# Altium PCB MAM17.PcbDoc
Units mil, origin at the board's own origin, x right, y up, seen from the top; angles counter-clockwise.
Board outline 3937.08 x 4724.82 mil, 2 copper layers (Top Layer, Bottom Layer); 65 components, 42 nets, 237 pads, 29 vias.
Unrouted connection lines stored in the file: 27.
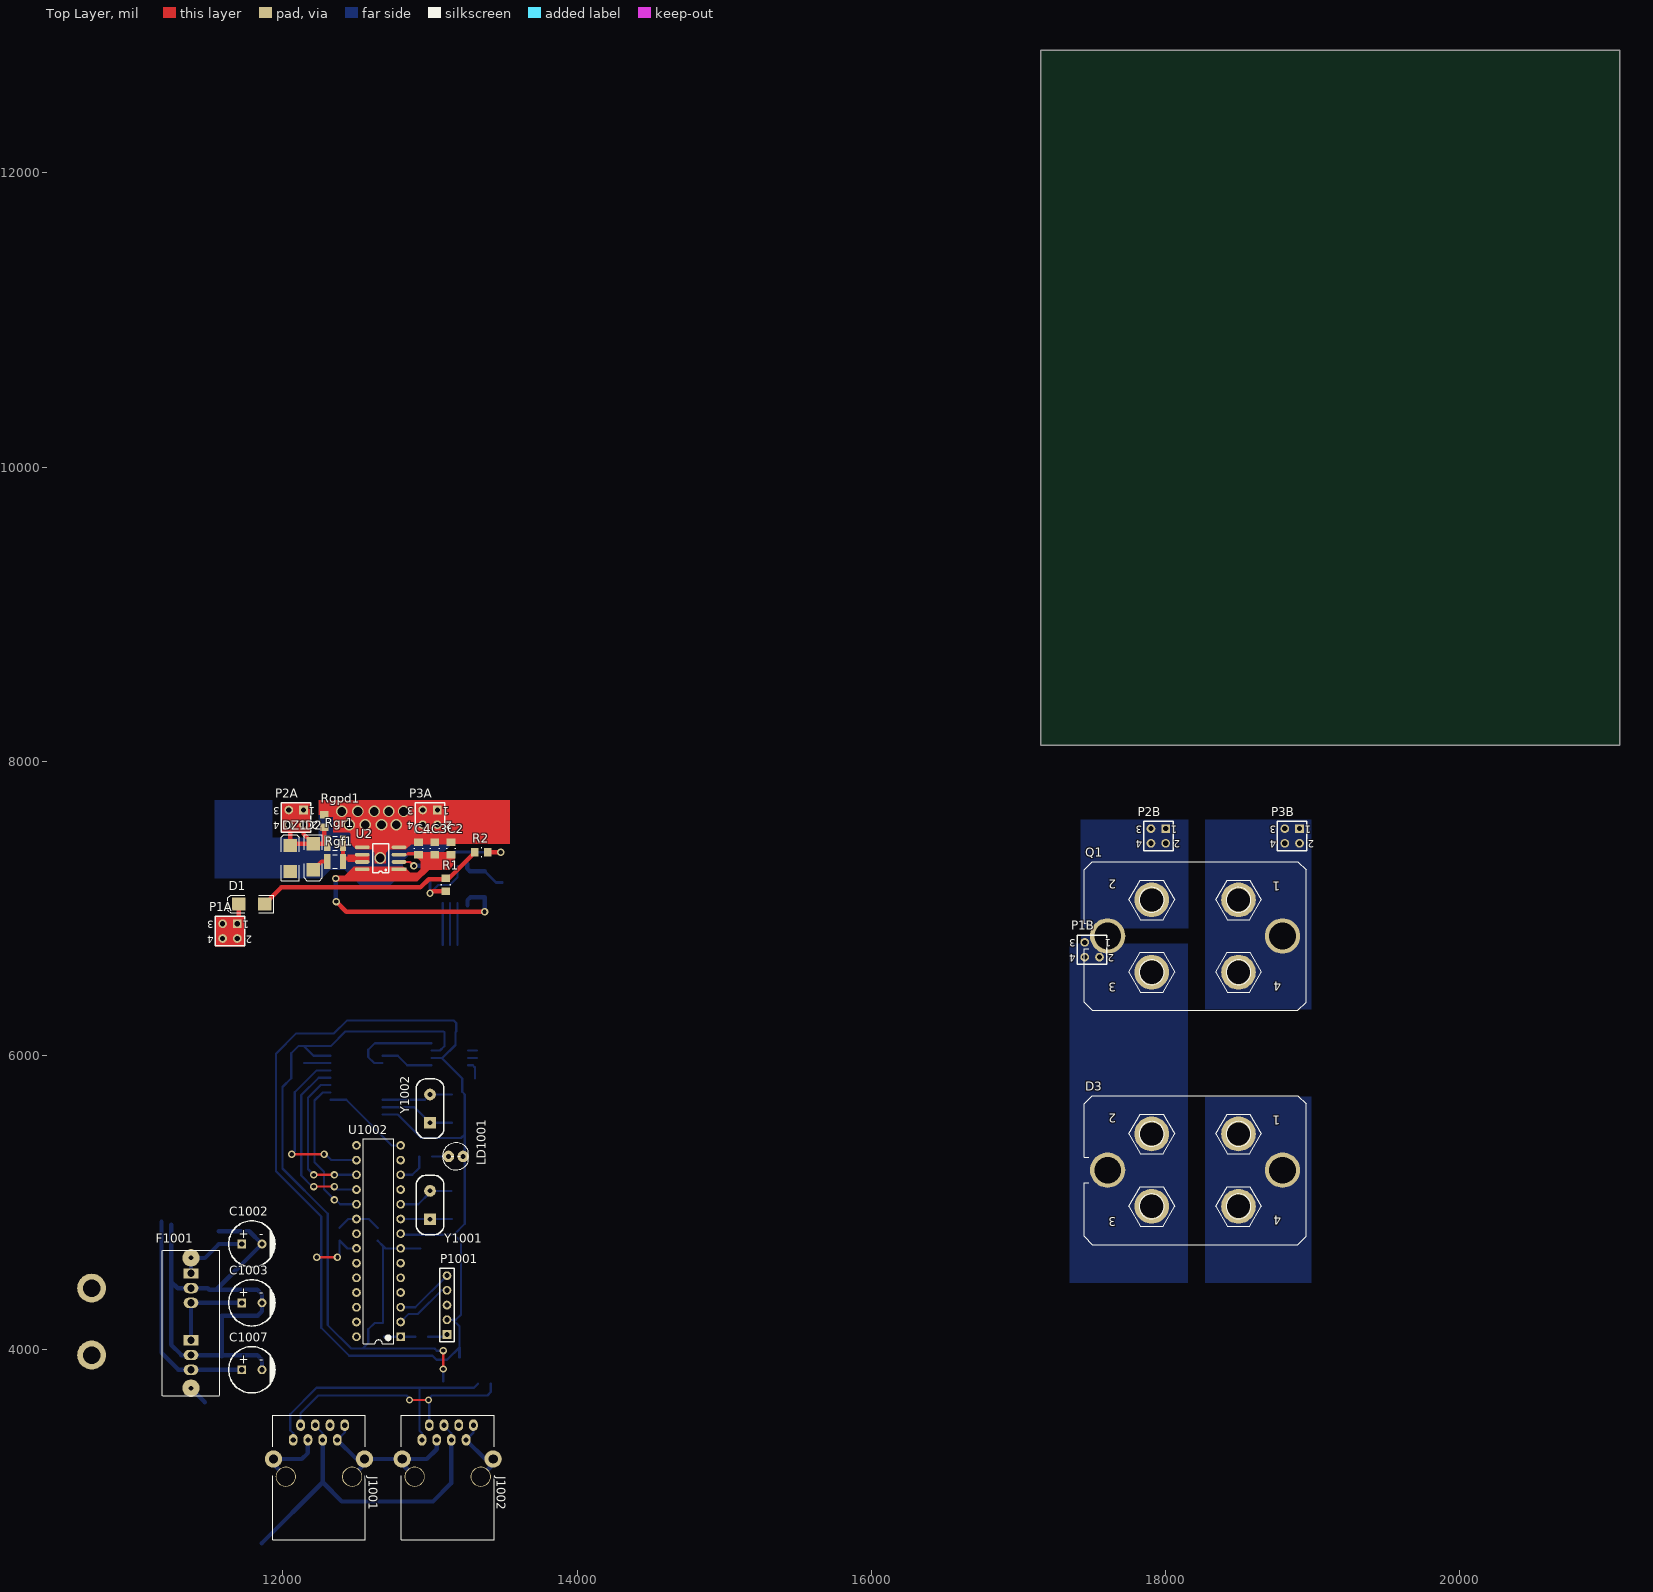
[diagram p0: Top Layer view]
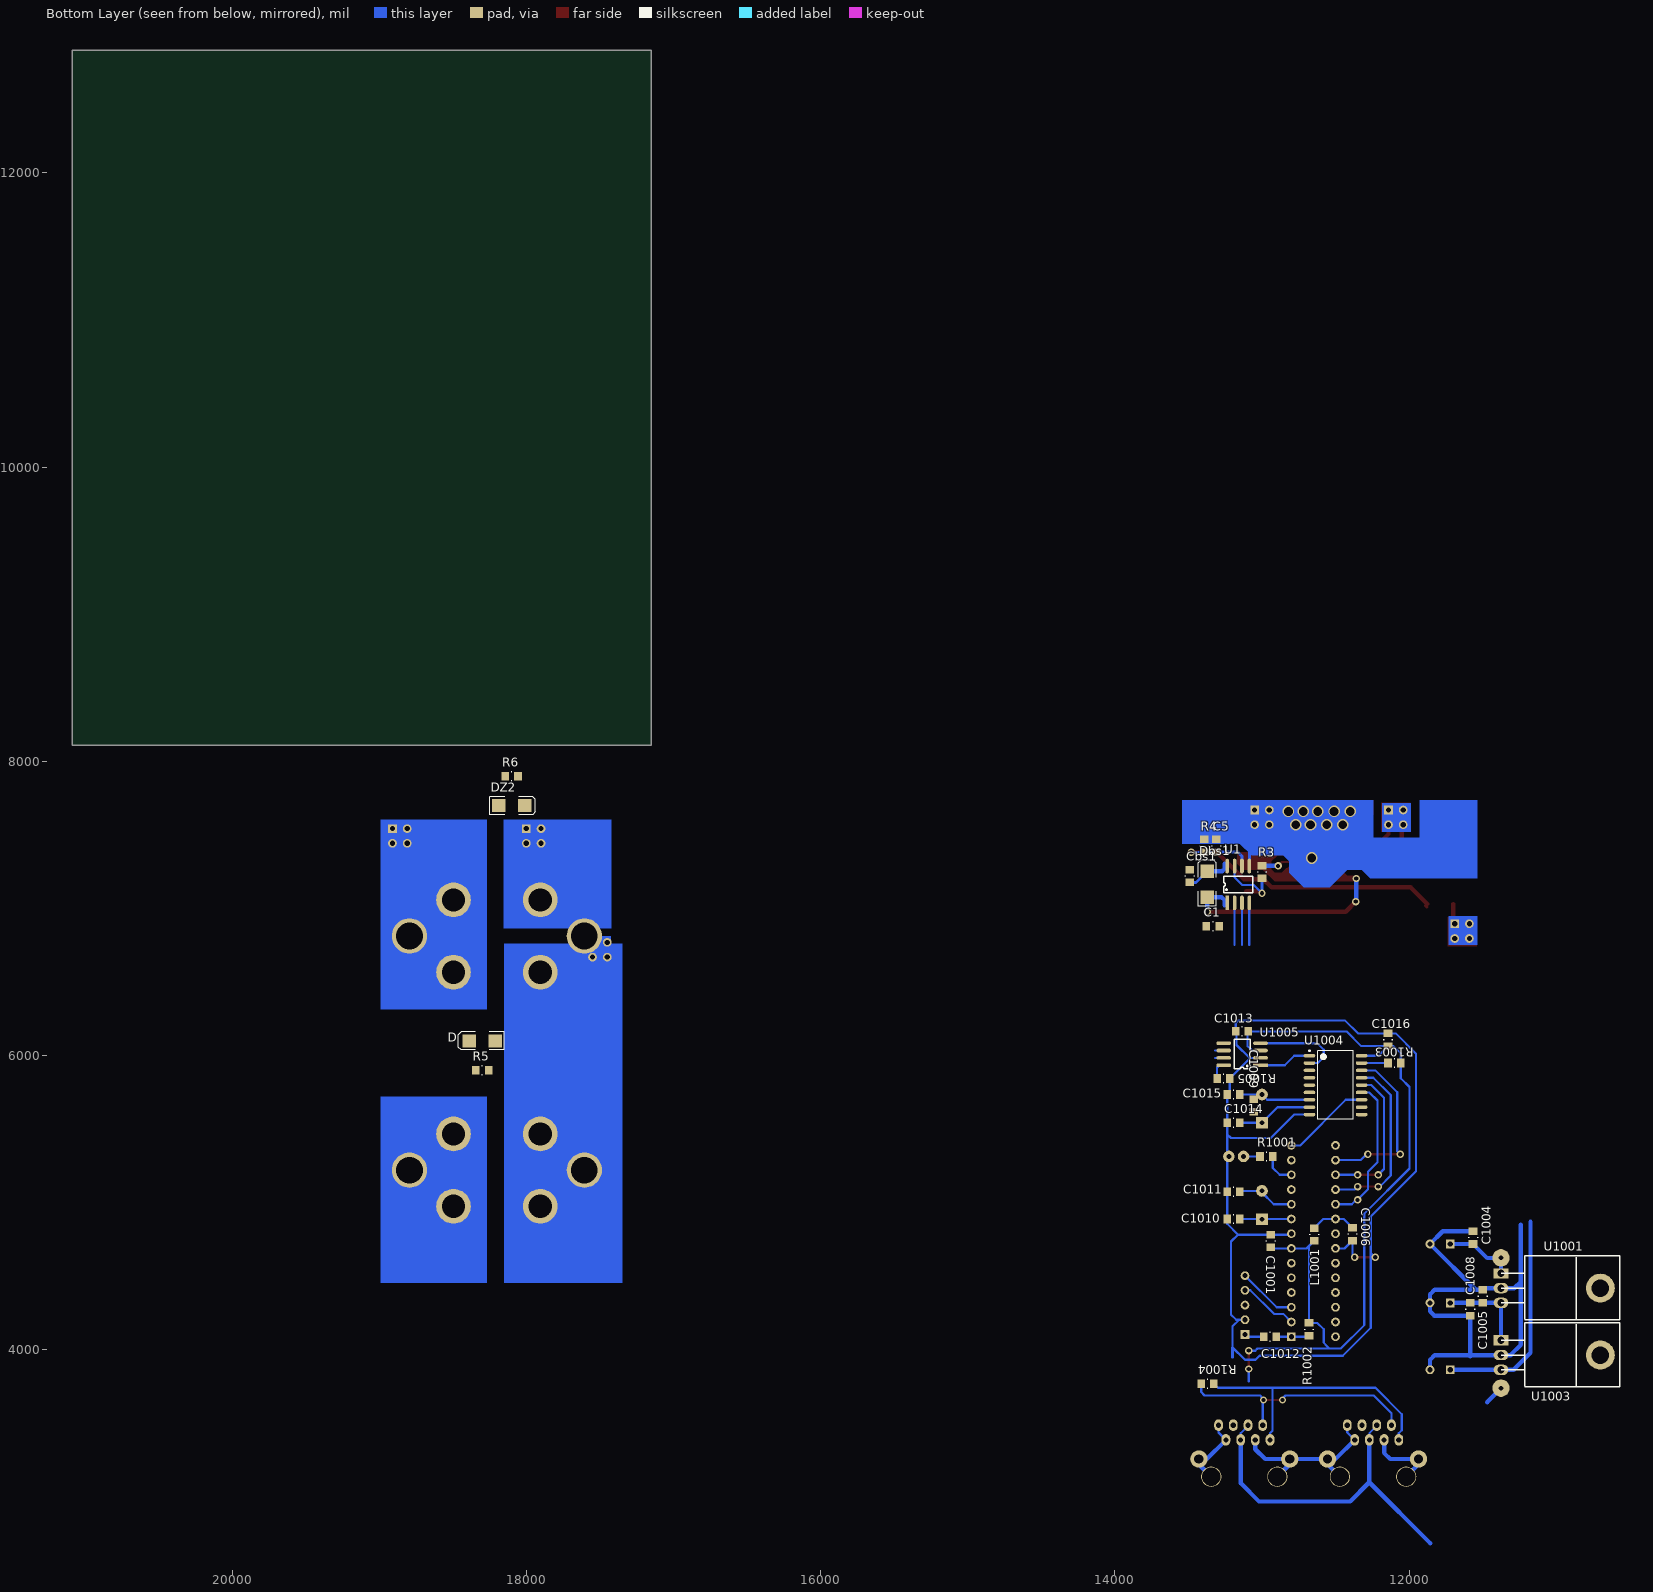
[diagram p1: Bottom Layer view, seen from below]

## Layer stack, top to bottom
Top Layer: signal copper 1.4
Dielectric: dielectric 12.6, FR-4, Dk 4.8
Bottom Layer: signal copper 1.4

## Board outline
17150,8110 17150,12834.41 17149.96,12833.98 21086.97,12833.98 21087,12834 21087,8109.59 21087.04,8110.02

## Design rules (kind name [scope] priority, off if disabled: settings)
Clearance [All] p1: gap=20
PolygonConnect [All] p1: connectstyle=Relief reliefconductorwidth=10 reliefentries=4 polygonreliefangle="90 Angle"
RoomDefinition driver [InComponentClass('driver')] p1: confinementstyle=ConfineIn formatcopy=TRUE lockcomponents=FALSE outline 0,0 2000,0 2000,1000 0,1000
RoomDefinition chopper [InComponentClass('chopper')] p2: confinementstyle=ConfineIn formatcopy=TRUE lockcomponents=FALSE outline 0,0 2000,0 2000,1000 0,1000
RoomDefinition atmega [InComponentClass('atmega')] p3: confinementstyle=ConfineIn formatcopy=TRUE lockcomponents=FALSE outline 0,0 2000,0 2000,1000 0,1000
RoutingVias [All] p1: holewidth=28 width=50 viastyle="Through Hole" minholewidth=28 minwidth=50 maxholewidth=78.74 maxwidth=78.74
SilkscreenOverComponentPads [All] p1: minsilkscreentomaskgap=10
SolderMaskExpansion [All] p1: expansion=4
Width [All] p1: maxlimit=30 minlimit=15 preferedwidth=20
27 further rules are at their usual default settings.

## Classes and differential pairs
component class chopper: C6 C7 C8 C9 C10 C11 C12 C13 C1009 D D3 DZ2 P1B P2B P3B Q1 R5 R6
component class driver: C1 C2 C3 C4 C5 Cbs1 D1 D2 Dbs1 DZ1 P1 P1A P2 P2A P3 P3A R1 R2 R3 R4 Rgf1 Rgpd1 Rgr1 U1 U2 U*1
component class atmega: C1001 C1002 C1003 C1004 C1005 C1006 C1007 C1008 C1010 C1011 C1012 C1013 C1014 C1015 C1016 F1001 J1001 J1002 L1001 LD1001 P1001 R1001 R1002 R1003 R1004 R1005 U1001 U1002 U1003 U1004 U1005 Y1001 Y1002

## Components (designator, comment, footprint, x,y, rotation, side; value= is the part's Value field where it differs from the comment)
C1 "100nF" 0805C 13334.02,6879.91 r180 bottom
C2 "100nF" 0805C 13142,7407.68 r90 top
C3 "1uF" 0805C 13032,7407.68 r90 top
C4 "10uF" 0805C 12922,7407.68 r90 top
C5 "100nF" 0805C 13310.73,7426.18 r90 bottom
C1001 "100nF" 0805C 12940,4740 r90 bottom
C1002 "CapacitorPol" CP3.5mm-8.0mm 11720,4720 r180 top
C1003 "CapacitorPol" CP3.5mm-8.0mm 11720,4320 r180 top
C1004 "100nF" 0805C 11565,4763.31 r270 bottom
C1005 "100nF" 0805C 11500,4365 r270 bottom
C1006 "100nF" 0805C 12385,4786.69 r90 bottom
C1007 "CapacitorPol" CP3.5mm-8.0mm 11720,3865 r180 top
C1008 "100nF" 0805C 11585,4276.69 r90 bottom
C1009 "???" 0805C 13055,5661.69 r90 bottom
C1010 "22pF" 0805C 13193.31,4890 r180 bottom
C1011 "22pF" 0805C 13193.31,5075 r180 bottom
C1012 "100nF" 0805C 12945,4090 r0 bottom
C1013 "100nF" 0805C 13135,6165 r0 bottom
C1014 "22pF" 0805C 13193.31,5543.94 r180 bottom
C1015 "22pF" 0805C 13193.31,5736.06 r180 bottom
C1016 "100nF" 0805C 12143.31,6108.31 r90 bottom
Cbs1 "100nF" 0805C 13491,7221 r90 bottom
D "ES3B" DSO-C2/X2.3 18300,6100 r0 bottom
D1 "BYD77" DSO-C2/X2.3 11788,7031 r180 top
D2 "ES3B" DSO-C2/X2.3 12206,7352 r270 top
D3 "DSEI2x101" SOT-227B 18200,5222 r180 top locked
Dbs1 "BAV102" DSO-C2/X2.3 13371.02,7165.91 r90 bottom
DZ1 "Z15V" DSO-C2/X2.3 12050,7340 r90 top
DZ2 "Z15V" DSO-C2/X2.3 18100,7700 r180 bottom
F1001 "250mA" "Porta Fusivel" 11375,4625.83 r270 top
J1001 "RJ45 (canbus)" "ASSMANN A-2004-2-4-LP/FS" 12245,3140 r0 top
J1002 "RJ45 (canbus)" "ASSMANN A-2004-2-4-LP/FS" 13120,3140 r0 top
L1001 "?H" 0805L 12645,4785 r90 bottom
LD1001 "GREEN" LED3MM 13125,5315 r0 top
P1A "DRAIN" HDR2X2 11690,6896.68 r180 top locked
P1B "DRAIN" HDR2X2 17550,6770 r180 top locked
P2A "GATE" HDR2X2 12140,7670 r180 top locked
P2B "GATE" HDR2X2 18000,7543.32 r180 top locked
P3A "SOURCE" HDR2X2 13050,7670 r180 top locked
P3B "SOURCE" HDR2X2 18910,7543.32 r180 top locked
P1001 "USART" HDR1X5 13115,4105 r90 top
Q1 "IXFN420N10T" SOT-227B 18200,6813 r180 top locked
R1 "22K" 0805R 13107,7162 r90 top
R2 "10K" 0805R 13348.43,7382.87 r180 top
R3 "0R" 0805R 13000.02,7248.58 r90 bottom
R4 "820R" 0805R 13391.73,7426.18 r270 bottom
R5 "???" 0805R 18300,5900 r180 bottom
R6 "10k" 0805R 18100,7900 r180 bottom
R1001 "470" 0805R 12970,5315 r0 bottom
R1002 "10k" 0805R 12680,4140 r90 bottom
R1003 "10k" 0805R 12100,5950 r180 bottom
R1004 "120" 0805R 13370,3770 r0 bottom
R1005 "10k" 0805R 13261.69,5845 r0 bottom
Rgf1 "4R7" RESC3225L 12355,7320 r0 top
Rgpd1 "10k" 0805R 12282,7595 r270 top
Rgr1 "10R" RESC3225L 12355,7444 r0 top
U1 "IR2127S" SOIC08-150(50) 13236.02,7038.58 r180 bottom
U2 "UCC2732x" SOIC08-THERMAL 12789,7266.68 r90 top
U1001 "LM7815" TO220_DEITADO 11217.52,4420 r270 bottom
U1002 "ATmega328P" DIP28-300(100) 12800,4090 r90 top
U1003 "LM7805" TO220_DEITADO 11217.52,3965 r270 bottom
U1004 "MCP2515-E/SO" WSO18_L 12500,5800 r180 bottom
U1005 "MCP2551-I/SN" SOIC08-150(50) 13010,5935 r90 bottom
Y1001 "16MHz" HC49-US-THT 13000,4985 r90 top
Y1002 "16MHz" HC49-US-THT 13000,5640 r90 top

## Footprints (in the part's own frame and the unit in brackets; to place one, negate y for a bottom-side part, rotate by r counter-clockwise, add the part's x,y. Pads: shape width x height; smd on the part's side, far side on the other; paste and mask are expansions set on the pad)
0805C [mm] "Chip Capacitor; Body 2 x 1.3 mm (LxW typ)"
  rect 1.3x1.5 smd: 1(-1.1,0) 2(1.1,0)
  silkscreen extent -0.05,-0.76 0.05,0.76, body extent -1,-0.64 1,0.62, height 0.78
0805L [mm] "Chip Inductor; Body 2 x 1.3 mm (LxW typ)"
  rect 1.3x1.5 smd: 1(1.1,0) 2(-1.1,0)
  silkscreen extent -0.05,-0.76 0.05,0.76, body extent -1,-0.59 1,0.61, height 0.95
0805R [mm] "Chip Resistor; Body 2 x 1.3 mm (LxW typ)"
  rect 1.3x1.5 smd: 1(1.1,0) 2(-1.1,0)
  silkscreen extent -0.05,-0.76 0.05,0.76, body extent -0.99,-0.63 1.01,0.63, height 0.8
"ASSMANN A-2004-2-4-LP/FS" [mm]
  oval 1.5x2 hole 0.9: 1(-4.445,6.31) 2(-3.175,8.85) 3(-1.905,6.31) 4(-0.635,8.85) 5(0.635,6.31) 6(1.905,8.85) 7(3.175,6.31) 8(4.445,8.85)
  round 3 hole 1.6: S(-7.855,3.01) S(7.845,3.01)
  round 3.5 hole 3.2: S(-5.715,-0.04) S(5.715,-0.04)
  silkscreen extent -8,-10.9 8,10.6, body extent -8,-10.9 8,10.6, height 13.6
CP3.5mm-8.0mm [mil] "Capacitor, Electrolytic, Radial; Body 8 x 10.5 mm (Dia.xH typ); Pin Spacing 3.5 mm (typ)"
  rect 60x60 hole 35: 1(0,0)
  round 60 hole 35: 2(-137.8,0)
  silkscreen extent -226,-157 89,157, body extent -226,-160 91,157, height 468
DIP28-300(100) [mm] "DIP, 28-Leads, Row Spacing 7.62mm, Pitch 2.54mm, Body 34.67x7.3mm"
  rect 1.5x1.5 hole 0.9: 1(0,0)
  round 1.5 hole 0.9: 2(2.54,0) 3(5.08,0) 4(7.62,0) 5(10.16,0) 6(12.7,0) 7(15.24,0) 8(17.78,0) 9(20.32,0) 10(22.86,0) 11(25.4,0) 12(27.94,0) 13(30.48,0) 14(33.02,0) 15(33.02,7.62) 16(30.48,7.62) 17(27.94,7.62) 18(25.4,7.62) 19(22.86,7.62) 20(20.32,7.62) 21(17.78,7.62) 22(15.24,7.62) 23(12.7,7.62) 24(10.16,7.62) 25(7.62,7.62) 26(5.08,7.62) 27(2.54,7.62) 28(0,7.62)
  silkscreen extent -1.19,1.16 34.21,6.46, body extent -1.4,-0.13 34.6,7.74, height 5.08
DSO-C2/X2.3 [mm] "DO-214-AA/SMB; 2 C-Bend Leads; Body 5.3 x 3.6 mm, inc. leads (LxW)"
  rect 2.3x2.3 smd: 1(-2.25,0) 2(2.25,0)
  silkscreen extent -3.8,-1.55 4.1,1.55, body extent -2.62,-1.35 2.58,1.32, height 1.34
HC49-US-THT [mil] "THT Quartz Crystal"
  rect 80x80 hole 32: 1(-96.06,0)
  round 80 hole 32: 2(96.06,0)
  silkscreen extent -203,-94 203,94, body extent -223,-91 224,92, height 138
HDR1X5 [mm] "Connector; Header; 5 Position"
  rect 1.5x1.5 hole 0.9: 1(0,0)
  round 1.5 hole 0.9: 2(2.54,0) 3(5.08,0) 4(7.62,0) 5(10.16,0)
  silkscreen extent -1.27,-1.27 11.43,1.27
HDR2X2 [mm] "Connector; Header; 2x2 Position"
  rect 1.5x1.5 hole 0.9: 1(0,0)
  round 1.5 hole 0.9: 2(0,2.54) 3(2.54,0) 4(2.54,2.54)
  silkscreen extent -1.27,-1.27 3.81,3.81
LED3MM [mm]
  round 2 hole 0.889: 1(0,0) 2(2.54,0)
  silkscreen extent -1.03,-2.31 3.43,2.36, body extent -0.63,-1.9 2.87,1.9, height 5.5
"Porta Fusivel" [mm]
  round 3 hole 0.8: 1(0,0) 2(22.5,0)
  silkscreen extent -1.27,-4.95 23.77,4.95, body extent -0.9,-4.8 23.5,4.6, height 12.6
RESC3225L [mm] "Chip Resistor, Body 3.2x2.5mm, IPC High Density"
  rect 1.1x2.6 smd: 1(-1.35,0) 2(1.35,0)
  silkscreen extent -0.4,-1.2 0.4,1.2, body extent -1.6,-0.79 1.6,0.81, height 0.55
SOIC08-150(50) [mil] "SOIC; 8 Leads; Row Spacing 3.81 mm; Pitch 1.27 mm; 3D Antonio Fagaldo"
  rect 25x100 smd: 1(0,0)
  oval 25x100 smd: 2(50,0) 3(100,0) 4(150,0) 5(150,250) 6(100,250) 7(50,250) 8(0,250)
  silkscreen extent -25,70 175,180, body extent -20,4 173,246, height 69
SOIC08-THERMAL [mil] "SOIC; 8 Leads; Row Spacing 3.81 mm; Pitch 1.27 mm; 3D Antonio Fagaldo"
  rect 25x100 smd: 1(0,0)
  oval 25x100 smd: 2(50,0) 3(100,0) 4(150,0) 5(150,250) 6(100,250) 7(50,250) 8(0,250)
  Top Layer region: 40,90 114.02,90 114.02,164.02 40,164.02
  silkscreen extent -25,70 175,180, body extent -20,4 173,246, height 69
SOT-227B [mm] "SOT-227; 4 Screw Terminals, 2 Mounting Holes"
  round 6 hole 4: 1(-7.493,-6.248) 2(7.493,-6.248) 3(7.493,6.248) 4(-7.493,6.248)
  round 6.1 hole 4.6: MH1(-15.1,0) MH2(15.1,0)
  silkscreen extent -19.15,-12.85 19.15,12.85, body extent -19.05,-12.45 19.05,12.45, height 12.02
TO220_DEITADO [mil]
  rect 70x100 hole 50: 1(-100,-157.48)
  oval 70x100 hole 50: 2(0,-157.48) 3(100,-157.48)
  silkscreen extent -220,-155 214,650, body extent -221,-522 220,632, height 185
WSO18_L [mm] "18-Pin Small Outline Integrated Circuit 1.27 mm Pitch, IPC High Density"
  oval 2x0.6 smd: 1(-4.5,5.08) 2(-4.5,3.81) 3(-4.5,2.54) 4(-4.5,1.27) 5(-4.5,0) 6(-4.5,-1.27) 7(-4.5,-2.54) 8(-4.5,-3.81) 9(-4.5,-5.08) 10(4.5,-5.08) 11(4.5,-3.81) 12(4.5,-2.54) 13(4.5,-1.27) 14(4.5,0) 15(4.5,1.27) 16(4.5,2.54) 17(4.5,3.81) 18(4.5,5.08)
  silkscreen extent -4.62,-5.9 3.1,6.05, body extent -3.8,-5.95 3.8,5.95, height 2.65

## Part data
C1 C2 C3 C4 C5 C1001 C1004 C1005 C1006 C1008 C1009 C1010 C1011 C1012 C1013 C1014 C1015 C1016 Cbs1: library part Cap_0805, "Capacitor"
C1002 C1003 C1007: "Solid Aluminum Capacitor with Organic Semiconductor Electrolyte: 100uF, 10V, Bulk Pack"
D D1 D2 Dbs1 DZ1 DZ2: library part Diode_SMA, "Diode"
F1001: library part "Fuse 1", "Fuse"
J1001 J1002: library part "Modular Jack with Shield", "YH-59-01"
L1001: library part Ind_0805, "Inductor"
LD1001: library part LED_0805, "LED"
P1A P1B P2A P2B P3A P3B: library part "Header 2X2", "Header, 2-Pin, Dual row"
P1001: library part "Header 5", "Header, 5-Pin"
R1 R2 R3 R4 R5 R6 R1001 R1002 R1003 R1004 R1005 Rgf1 Rgpd1 Rgr1: library part Res_0805, "Resistor"
U1: "Current Sensing Single Channel Driver"
U1001 U1003: library part µA7805CKC, "Positive-Voltage Regulator"
U1002: "8-bit AVR Microcontroller, 32KB Flash, 1KB EEPROM, 2KB SRAM, 28-pin PDIP, Industrial Grade (-40°C to 85°C)"
U1004: library part CMP-0186-00035-2, "Stand-Alone CAN Controller With SPI Interface, 18-Pin SOIC, Extended Temperature"
U1005: library part CMP-1721-00003-1, "High-Speed CAN Transceiver, / 1 Mb/s, 4.5 to 5.5 V, 8-Pin SOIC (SN), Industrial Temperature, RoHS, Tube"
Y1001 Y1002: library part Crystal, "Crystal"

## Free pads (board coordinates)
  round 196.85 hole 118.11: 0(10700,3965) 0(10700,4420)

## Via types
v1: diameter 50, hole 28, Top Layer to Bottom Layer, 19 vias
v2: diameter 78.74, hole 59.06, Top Layer to Bottom Layer, 10 vias

## Nets (pads, with @x,y where several pads share a name; then routed paths per layer and width w, separated by ;. In a path a pad name is that pad's centre, name@x,y a point inside that pad or via, vN(x,y) a via of type N, cw(c..) or ccw(c..) an arc to the next point about the centre after c; other vN are vias at no path point)
+5V: C1001.1 C1007.1 C1009.2 C1013.1 C1016.1 L1001.2 R1002.1 R1003.1 U1002.7 U1003.3 U1004.18 U1005.3 | length 7136.1
  Top Layer w15: v1(13090,3870) v1(13090,3995)
  Bottom Layer w15: U1004.18 12208.31,6000 C1016.1 ; L1001.2 12680,4706.69 ; C1001.1@12933.31,4690 U1002.7 12696.69,4690 12680,4706.69 ; U1005.3 13068.21,6035 13097.5,6064.29 C1013.1@13097.5,6159.19 ; v1(13090,3995) 13045.25,3995 13030.25,4010 12545,4010 ; C1013.1 12425,6165 12325,6065 C1016.1 ; C1016.1 12105,6065 12056.69,6016.69 R1003.1 12056.69,5846.69 11997.5,5787.5 11997.5,5232.5 12305,4925 12305,4168.64 12463.64,4010 12545,4010 ; 12545,4010 12580,4050 12580,4140 12623.31,4183.31 R1002.1 12680,4706.69
  Bottom Layer w20: 13090,3790 v1(13090,3870)
  Bottom Layer w30: 11175,4870 11175,3980 11290,3865 U1003.3 C1007.1
+5V_ADC: C1006.2 L1001.1 U1002.20 | length 310.4
  Bottom Layer w15: C1006.2 12445,4890 U1002.20 12583.31,4890 L1001.1
+15V: C1.1 C2.1 C3.1 C4.1 C1003.1 C1005.2 C1008.2 Dbs1.1 U1.1 U2.1 U2.3 U2.8 U1001.3 U1003.1 | length 3146.9
  Top Layer w10: U2.3 U2.3@12790,7366.68
  Top Layer w15: v1(12358.87,7204.09) 12360.21,7202.76 12410.43,7202.76 12474.35,7266.68 U2.8 U2.1 12833.32,7266.68 12862.5,7237.5 12917.5,7237.5 12942.5,7262.5 12942.5,7332.25 12922,7352.75 C4.1 ; U2.3 C4.1@12922,7366.68
  Top Layer w30: v1(12362.2,7047.24) 12431.06,6978.39 v1(13371.02,6978.39) ; C4.1 C3.1 C2.1
  Bottom Layer w15: v1@12358.52,7203.74 v1(12358.87,7204.09)
  Bottom Layer w30: U1003.1 U1001.3 11500,4320 C1008.2 C1003.1 ; v1@12358.87,7050.58 v1(12358.87,7204.09) ; 13254.92,7022.64 13254.92,7038.58 13254.92,7057.48 13274.76,7077.32 Dbs1.1 v1(13371.02,6978.39)
+18V: C1002.1 C1004.2 F1001.1 U1001.1 | length 489.4
  Bottom Layer w30: U1001.1 11375,4625 11470,4625 C1004.2 C1002.1
+18V_PRE: F1001.2 J1001.4 J1001.5 J1002.4 J1002.5 | length 2525.1
  Bottom Layer w15: J1001.4 12220,3483.79 12270,3433.79 J1001.5 ; J1002.4 13095,3483.79 13145,3433.79 J1002.5
  Bottom Layer w30: F1001.2 11470,3645 ; 11855,2685 12270,3100 ; J1001.5 12270,3100 ; J1002.5 13145,3095 13020,2970 12400,2970 12270,3100
BUZZER: U1002.13
CAN_GND: C1.2 C2.2 C3.2 C4.2 C5.2 C1001.2 C1002.2 C1003.2 C1004.1 C1005.1 C1006.1 C1007.2 C1008.1 C1009.1 C1010.1 C1011.1 C1013.2 C1014.1 C1015.1 C1016.2 Cbs1.2 DZ1.1 DZ2.1 J1001.3 J1001.7 J1001.8 J1001.S J1002.3 J1002.7 J1002.8 J1002.S LD1001.2 P3A.1 P3A.2 P3A.3 P3A.4 P3B.1 P3B.2 P3B.3 P3B.4 P1001.2 Q1.1 Q1.4 R4.2 R6.2 R1005.2 Rgpd1.2 U1.4 U1.5 U2.4 U2.5 U1001.2 U1002.8 U1002.22 U1003.2 U1004.9 U1005.2 | length 15486.8
  Top Layer w15: v1(12230,4630) v1(12370,4630) ; U2.4 12823.31,7450.98 12860.24,7450.98
  Top Layer w30: Rgpd1.2 12358.31,7638.31 ; 12860.24,7450.98 C4.2 C3.2 C2.2
  Bottom Layer w15: C1016.2@12143.31,6150 12346.36,6150 12436.36,6240 13160,6240 13178.31,6221.69 C1013.2 ; C1016.2 12091.61,6151.61 11952.5,6012.5 11952.5,5213.86 12260,4906.36 12260,4660 ; v1(12230,4630) 12260,4660 ; J1001.7 12420,3438.43 J1001.8 ; v1(12370,4630) 12385,4645 C1006.1 12438.39,4690 U1002.22 ; U1004.9 12780,5600 12940,5440 13210,5440 13236.61,5466.61 ; U1002.8 12806.69,4783.31 C1001.2 13163.31,4783.31 ; U1005.2 13085,5985 ; 13086.02,6753.91 U1.4 ; P1001.2 13155,4205 ; C1013.2@13172.5,6159.19 13172.5,6072.5 13085,5985 ; J1002.7 13295,3438.43 J1002.8 ; 12260,4660 12260,4630 12260,4150 12450,3960 13016.61,3960 13044.11,3932.5 13115.89,3932.5 13200,4016.61 13200,4160 13155,4205 ; 13085,5985 13085,5978.39 R1005.2 13218.39,5754.29 C1015.1 C1014.1 13236.61,5466.61 ; 13155,4205 13175,4205 13210,4240 13210,4736.61 13163.31,4783.31 ; 13163.31,4783.31 13236.61,4856.61 C1010.1 C1011.1 13236.61,5315 13236.61,5466.61
  Bottom Layer w20: U1.5 13086.02,7406.89 13148.62,7469.49 C5.2 R4.2 ; 13200,3950 13200,4016.61
  Bottom Layer w30: 11240,4850.15 11240,4465 ; C1004.1 11771.18,4806.61 C1002.2 11546.1,4408.31 ; 11585,3956.61 11585,3965 ; C1007.2 11857.8,3932.2 11825,3965 11585,3965 ; J1001.S@12020,3138.43 11935.75,3222.68 11935.75,3258.5 12128.5,3258.5 12170,3300 J1001.3 ; J1001.7 12499.92,3258.5 J1001.S@12553.86,3258.5 ; J1001.S@12470,3138.43 12553.86,3222.28 J1001.S@12553.86,3258.5 ; J1002.S@12895,3138.43 12810.75,3222.68 J1002.S@12810.75,3258.5 ; J1002.3 13045,3325 12978.5,3258.5 J1002.S@12810.75,3258.5 ; J1002.7 13374.92,3258.5 13428.86,3258.5 13428.86,3222.28 J1002.S@13345,3138.43 ; 11240,4465 11285,4420 U1001.2 11488.31,4420 C1005.1 11546.1,4408.31 ; 11240,4465 11240,4035 11310,3965 U1003.2 11585,3965 ; 11546.1,4408.31 11826.69,4408.31 11857.8,4377.2 C1003.2 11857.8,4262.8 11828.39,4233.39 C1008.1 11585,3965 ; J1001.S@12553.86,3258.5 J1002.S@12810.75,3258.5
  other v2: 12661.42,7343.5 12450,7570 12560,7570 12670,7570 12770,7570 12400,7660 12510,7660 12620,7660 12720,7660 12820,7660
CAN_H: J1001.1 J1002.1 R1004.2 U1005.7 | length 1990.3
  Bottom Layer w15: J1001.1@12050,3408.43 J1001.1 12070,3433.79 12050,3453.79 12050,3563.64 12228.86,3742.5 13299.19,3742.5 R1004.2 ; 12927.5,3500 12927.5,3740 ; 12927.97,3499.53 12927.97,3450.82 12945,3433.79 J1002.1 ; U1005.7 13318.21,5985
CAN_L: J1001.2 J1002.2 R1004.1 U1005.6 | length 1722.6
  Top Layer w15: v1(12860,3660) v1(12990,3660)
  Bottom Layer w15: J1001.2 12120,3570 12240,3690 12840,3690 12860,3670 v1(12860,3660) ; J1002.2 v1@12995,3655 ; 13005,3681.36 13013.64,3690 13390,3690 13413.31,3713.31 R1004.1 ; U1005.6 13318.21,6035
DRAIN: D1.2 D3.2 D3.3 D.1 P1A.1 P1A.2 P1A.3 P1A.4 P1B.1 P1B.2 P1B.3 P1B.4 Q1.3 R5.1 | length 138.2
  Top Layer w30: P1A.1 11699.42,6906.09 D1.2
GATE: D2.1 DZ1.2 DZ2.2 P2A.1 P2A.2 P2A.3 P2A.4 P2B.1 P2B.2 P2B.3 P2B.4 Q1.2 R6.1 Rgpd1.1 Rgr1.1 | length 624.1
  Top Layer w30: DZ1.2 P2A.4@12050,7560 ; DZ1.2@12062,7440.58 D2.1 ; P2A.2 12140,7506.58 D2.1 ; Rgr1.1@12282,7457.02 Rgpd1.1 ; Rgr1.1 12298.43,7440.58 D2.1
IR2127_FAULT: U1.3 U1002.5 | length 284.7
  Bottom Layer w15: 13136.02,6753.91 U1.3
IROUT: R1.2 R3.2 U1.7 | length 520.9
  Top Layer w30: v1(13000.02,7103.89) 13014.83,7118.69 R1.2
  Bottom Layer w15: v1(13000.02,7103.89) 13056.72,7160.58 13133.02,7160.58 13186.02,7213.58 U1.7
  Bottom Layer w20: v1(13000.02,7103.89) R3.2
LED: R1001.2 U1002.12 | length 224.3
  Bottom Layer w15: U1002.12 12880,5190 12926.69,5236.69 R1001.2
MCP2515_INT: U1002.14 U1004.12 | length 605.6
  Bottom Layer w15: U1004.12 12430,5700 12740,5390 U1002.14
MCP2515_MISO: U1002.18 U1004.15 | length 1208.2
  Top Layer w15: v1(12210,5110) v1(12350,5110)
  Bottom Layer w15: v1(12210,5110) 12200,5110 12125,5185 12125,5732.28 12242.72,5850 U1004.15 ; v1(12350,5110) 12370,5090 U1002.18
MCP2515_MOSI: U1002.17 U1004.14 | length 1028.8
  Top Layer w15: v1@12200,5190 v1(12210,5190) v1(12350,5190)
  Bottom Layer w15: v1(12210,5190) 12170,5230 12170,5713.64 12256.36,5800 U1004.14 ; v1(12350,5190) U1002.17
MCP2515_SCK: U1002.19 U1004.13 | length 1024
  Bottom Layer w15: U1004.13 12270,5750 12215,5695 12215,5275 12280,5210 12280,5090 v1(12350,5020) 12360,5010 12370,5010 12390,4990 U1002.19
MCP2515_SS: U1002.16 U1004.16 | length 1190.4
  Top Layer w15: v1(12060,5330) v1(12280,5330)
  Bottom Layer w15: v1(12060,5330) 12080,5350 12080,5750.92 12229.08,5900 U1004.16 ; v1(12280,5330) 12290,5330 12330,5290 U1002.16
NetC5_1: C5.1 R2.2 R4.1 U1.6 | length 511.1
  Top Layer w30: R2.2 v1(13480.31,7382.87)
  Bottom Layer w15: C5.1 R4.1 v1@13470.73,7382.87
  Bottom Layer w20: U1.6 13136.02,7355.51 13163.39,7382.87 C5.1 ; v1@13470.73,7382.87 v1(13480.31,7382.87)
NetC1009_2: D.2 R5.2
NetC1012_1: C1012.1 R1002.2 U1002.1 | length 215
  Bottom Layer w15: R1002.2@12686.69,4090 U1002.1 C1012.1
NetC1014_2: C1014.2 U1004.8 Y1002.1 | length 516.8
  Bottom Layer w15: U1004.8 12893.94,5650 Y1002.1 C1014.2
NetC1015_2: C1015.2 U1004.7 Y1002.2 | length 487.8
  Bottom Layer w15: U1004.7 12963.94,5700 Y1002.2 C1015.2
NetCbs1_1: Cbs1.1 Dbs1.2 U1.8 | length 310.8
  Bottom Layer w20: Dbs1.2 13447.82,7177.69 Cbs1.1
  Bottom Layer w30: 13251.97,7305.12 13251.97,7288.58 13251.97,7272.64 13270.12,7254.49 Dbs1.2
NetD1_1: D1.1 R1.1 R2.1 | length 1595.2
  Top Layer w20: D1.1@11879.08,7009.5 D1.1@11888.58,7019 ; R1.1@13101.69,7200 R1.1
  Top Layer w30: D1.1 11989.67,7144.09 12934.45,7144.09 12990.35,7200 13101.69,7200 13107,7200 13122.24,7200 R2.1
NetD2_2: D2.2 Rgf1.1 | length 119.3
  Top Layer w30: D2.2 12262.58,7320 Rgf1.1
NetD3_1: D3.1 D3.4
NetLD1001_1: LD1001.1 R1001.1 | length 111.7
  Bottom Layer w15: R1001.1 LD1001.1
NetR1003_2: R1003.2 U1004.17 | length 179.5
  Bottom Layer w15: R1003.2 U1004.17
NetR1005_1: R1005.1 U1005.8 | length 126.2
  Bottom Layer w15: U1005.8 13290,5935 13305,5920 R1005.1
NetRgf1_2: Rgf1.2 Rgr1.2 U2.6 U2.7 | length 245.7
  Top Layer w15: Rgf1.2 Rgf1.2@12418.15,7330
  Top Layer w30: Rgf1.2 Rgf1.2@12408.15,7340 ; Rgr1.2 Rgf1.2@12408.15,7340 ; 12515.68,7340 Rgf1.2@12408.15,7340
PWM: U1.2 U1002.15 | length 284.7
  Bottom Layer w15: 13186.02,6753.91 U1.2
RXCAN: U1004.2 U1005.4 | length 612.4
  Bottom Layer w15: U1004.2 12620,5950 12580,5990 12580,6040 12625,6085 U1005.4
SINK_T: U1002.27
TXCAN: U1004.1 U1005.1 | length 359.8
  Bottom Layer w15: U1004.1 12780,6000 12845,5935 U1005.1
UCCIN: R3.1 U2.2 | length 222.9
  Top Layer w15: U2.2 12863.32,7316.68 v1(12890,7290)
  Bottom Layer w30: v1(12890,7290) 12891.89,7291.89 R3.1
USART_RTS: C1012.2 P1001.1 | length 132.9
  Bottom Layer w15: C1012.2 13100,4090 P1001.1
USART_RX: P1001.4 U1002.2 | length 404.1
  Bottom Layer w15: U1002.2 12855,4245 12918.64,4245 13078.64,4405 P1001.4
USART_TX: P1001.5 U1002.3 | length 404.1
  Bottom Layer w15: U1002.3 12900,4290 P1001.5
XTAL1: C1010.2 U1002.9 Y1001.1 | length 347.9
  Bottom Layer w15: U1002.9@12801.06,4888.94 Y1001.1 ; Y1001.1@13001.06,4890 C1010.2
XTAL2: C1011.2 U1002.10 Y1001.2 | length 377.1
  Bottom Layer w15: U1002.10 12920,4990 Y1001.2@13000,5070 ; Y1001.2 C1011.2@13143.94,5081.06
pads on no net: D3.MH1 D3.MH2 J1001.6 J1002.6 P1001.3 Q1.MH1 Q1.MH2 U1002.4 U1002.6 U1002.11 U1002.21 U1002.23 U1002.24 U1002.25 U1002.26 U1002.28 U1004.3 U1004.4 U1004.5 U1004.6 U1004.10 U1004.11 U1005.5
copper on no net: | length 492.1
  Bottom Layer w50: 17916.51,6263.49 18072,6108
  Bottom Layer w60: 17916.51,6365.49 18109,6173

## Other copper
Top Layer:
  rectangle net CAN_GND: 12340,7520 12450,7720
  rectangle net NetRgf1_2: 12440,7316.68 12590,7366.68
  rectangle net DRAIN: 11540,6742.68 11740,6942.68
  rectangle net GATE: 11990,7520 12190,7720
  region net +15V: 12342.52,7185.04 12342.52,7224.41 12421.26,7224.41 12480.32,7283.46 12816.7,7283.46 12862.5,7237.5 12917.5,7237.5 12942.5,7262.5 12942.5,7313.98 12893.7,7362.2 12814.96,7362.2 12814.96,7366.68 12834.65,7366.68 12849.86,7381.89 13169.29,7381.89 13169.29,7303.15 13129.92,7263.78 12993.11,7263.78 12914.37,7185.04
  region net CAN_GND: 13543.31,7736.22 12244.09,7736.22 12244.09,7637.8 12244.61,7638.31 12342.52,7638.31 12342.52,7519.69 12342.83,7520 12450,7520 12460.63,7509.37 12460.63,7440.94 12500,7401.57 12604.1,7401.57 12624.98,7380.69 12624.98,7306.68 12699,7306.68 12699,7380.69 12719.88,7401.57 12834.65,7401.57 12874.02,7440.94 13543.31,7440.94
Bottom Layer:
  rectangle net DRAIN: 11535.43,6751.97 11732.28,6948.82
  rectangle net GATE: 11988.19,7519.69 12185.04,7716.54
  region net CAN_GND: 18268.6,7605 18268.6,6313 18990,6313 18990,7605
  region net GATE: 18154.43,6863 18154.43,7605 17420,7605 17420,6863
  region net DRAIN: 17345,6763 17345,4455 18150.83,4455 18150.83,6763
  region net NetD3_1: 18268.6,5722 18268.6,4455 18990,4455 18990,5722
  rectangle: 17495,6635 17755,6763
  rectangle: 17425,6635 17605,6815
  region net CAN_GND: 13543.31,7736.22 12244.09,7736.22 12244.09,7480.31 11929.13,7480.31 11929.13,7736.22 11535.43,7736.22 11535.43,7204.72 12263.78,7204.72 12322.83,7263.78 12421.26,7263.78 12539.37,7145.67 12716.54,7145.67 12814.96,7244.09 12814.96,7322.83 12854.33,7362.2 13070.87,7362.2 13149.61,7440.94 13543.31,7440.94

## Silkscreen, mask and mechanical layers (free items; w line width, h text height)
Mechanical 1:
  lines w10: 17149.96,12833.98 21086.97,12833.98 ; 17150,8110 17150,12834.41 ; 17150.03,8110.02 21087.04,8110.02 ; 17309,4415 17309,7808 ; 17315,4413 19275,4413 ; 17315,7812 19275,7812 ; 19269,4415 19269,7808 ; 21087,8109.59 21087,12834

## Text inside footprints (layer, text, board x,y; h text height)
C1002: Top Overlay "-" at 11840,4760 h59.06; Top Overlay "+" at 11700,4760 h59.06
C1003: Top Overlay "-" at 11840,4360 h59.06; Top Overlay "+" at 11700,4360 h59.06
C1007: Top Overlay "-" at 11840,3905 h59.06; Top Overlay "+" at 11700,3905 h59.06
D3: Top Overlay "1" at 18778.74,5592.08 h59.05 r180; Top Overlay "2" at 17664.57,5603.89 h59.05 r180; Top Overlay "3" at 17664.57,4903.1 h59.05 r180; Top Overlay "4" at 18786.61,4910.98 h59.05 r180
P1A: Top Overlay "3" at 11530,6916.68 h50 r180; Top Overlay "4" at 11530,6816.68 h50 r180; Top Overlay "2" at 11790,6816.68 h50 r180; Top Overlay "1" at 11770,6916.68 h50 r180
P1B: Top Overlay "3" at 17390,6790 h50 r180; Top Overlay "4" at 17390,6690 h50 r180; Top Overlay "2" at 17650,6690 h50 r180; Top Overlay "1" at 17630,6790 h50 r180
P2A: Top Overlay "3" at 11980,7690 h50 r180; Top Overlay "4" at 11980,7590 h50 r180; Top Overlay "2" at 12240,7590 h50 r180; Top Overlay "1" at 12220,7690 h50 r180
P2B: Top Overlay "3" at 17840,7563.32 h50 r180; Top Overlay "4" at 17840,7463.32 h50 r180; Top Overlay "2" at 18100,7463.32 h50 r180; Top Overlay "1" at 18080,7563.32 h50 r180
P3A: Top Overlay "3" at 12890,7690 h50 r180; Top Overlay "4" at 12890,7590 h50 r180; Top Overlay "2" at 13150,7590 h50 r180; Top Overlay "1" at 13130,7690 h50 r180
P3B: Top Overlay "3" at 18750,7563.32 h50 r180; Top Overlay "4" at 18750,7463.32 h50 r180; Top Overlay "2" at 19010,7463.32 h50 r180; Top Overlay "1" at 18990,7563.32 h50 r180
Q1: Top Overlay "4" at 18786.61,6501.98 h59.05 r180; Top Overlay "3" at 17664.57,6494.1 h59.05 r180; Top Overlay "2" at 17664.57,7194.89 h59.05 r180; Top Overlay "1" at 18778.74,7183.08 h59.05 r180